# Altium PCB MAX98357.PcbDoc
Units mm, origin at the board's own origin, x right, y up, seen from the top; angles counter-clockwise.
Board outline 24.23 x 22.75 mm, 2 copper layers (Top Layer, Bottom Layer); 11 components, 13 nets, 57 pads, 48 vias.
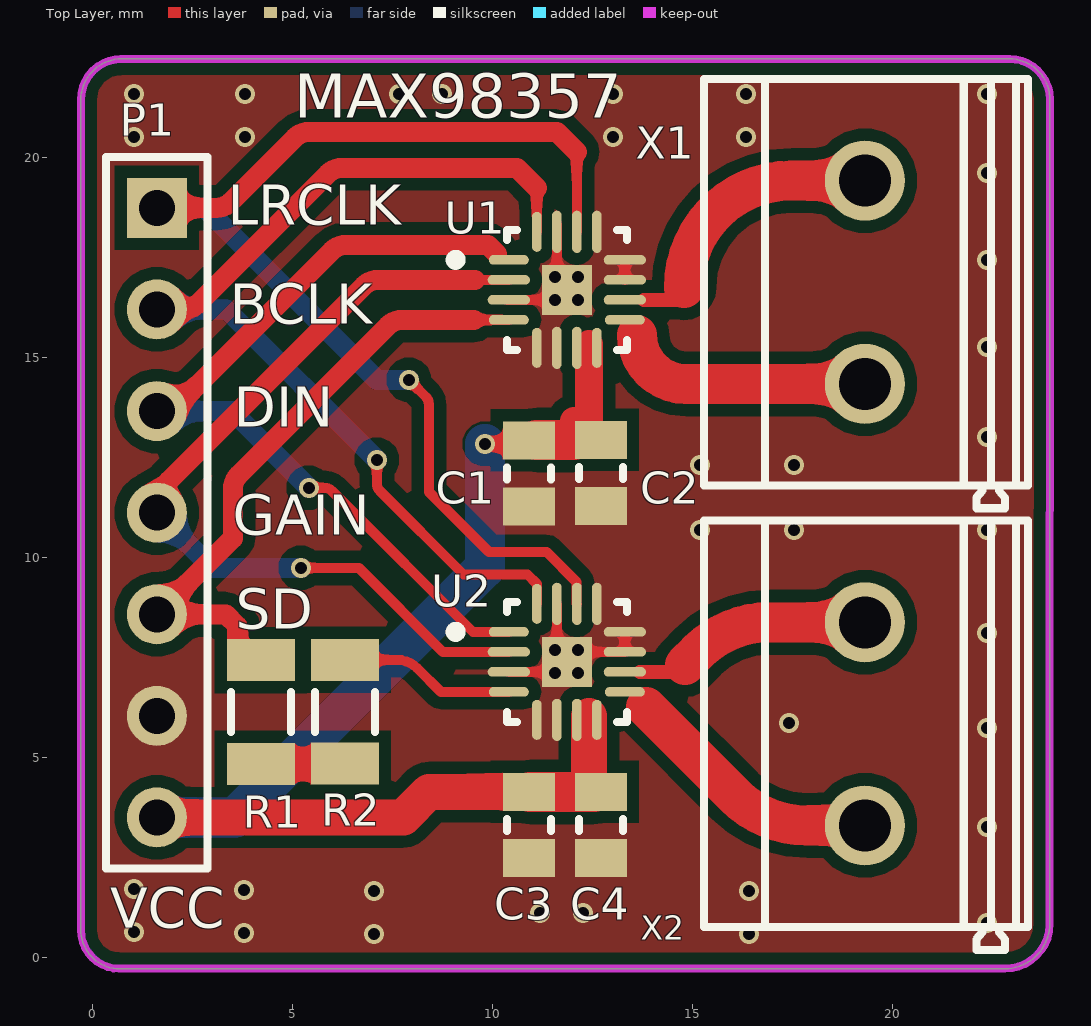
[diagram p0: Top Layer view]
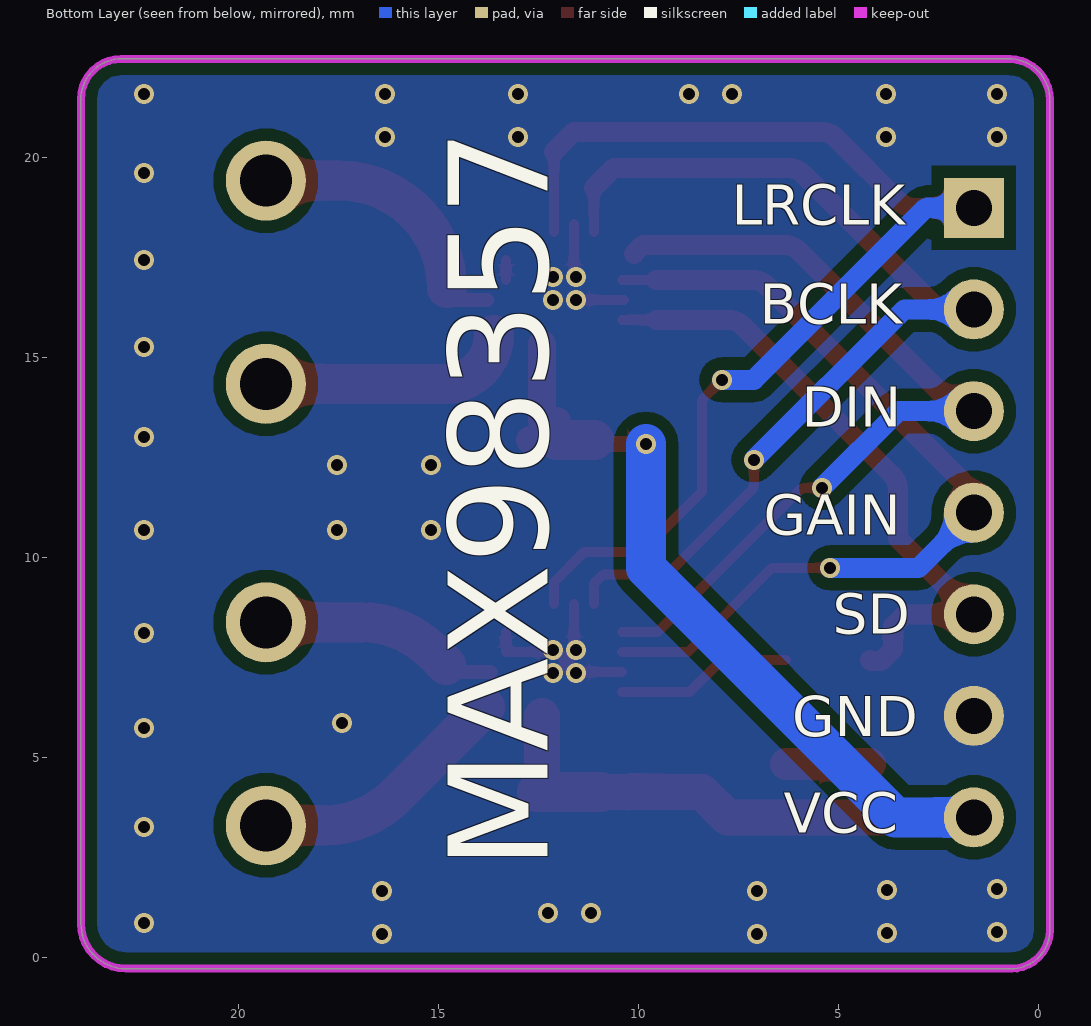
[diagram p1: Bottom Layer view, seen from below]
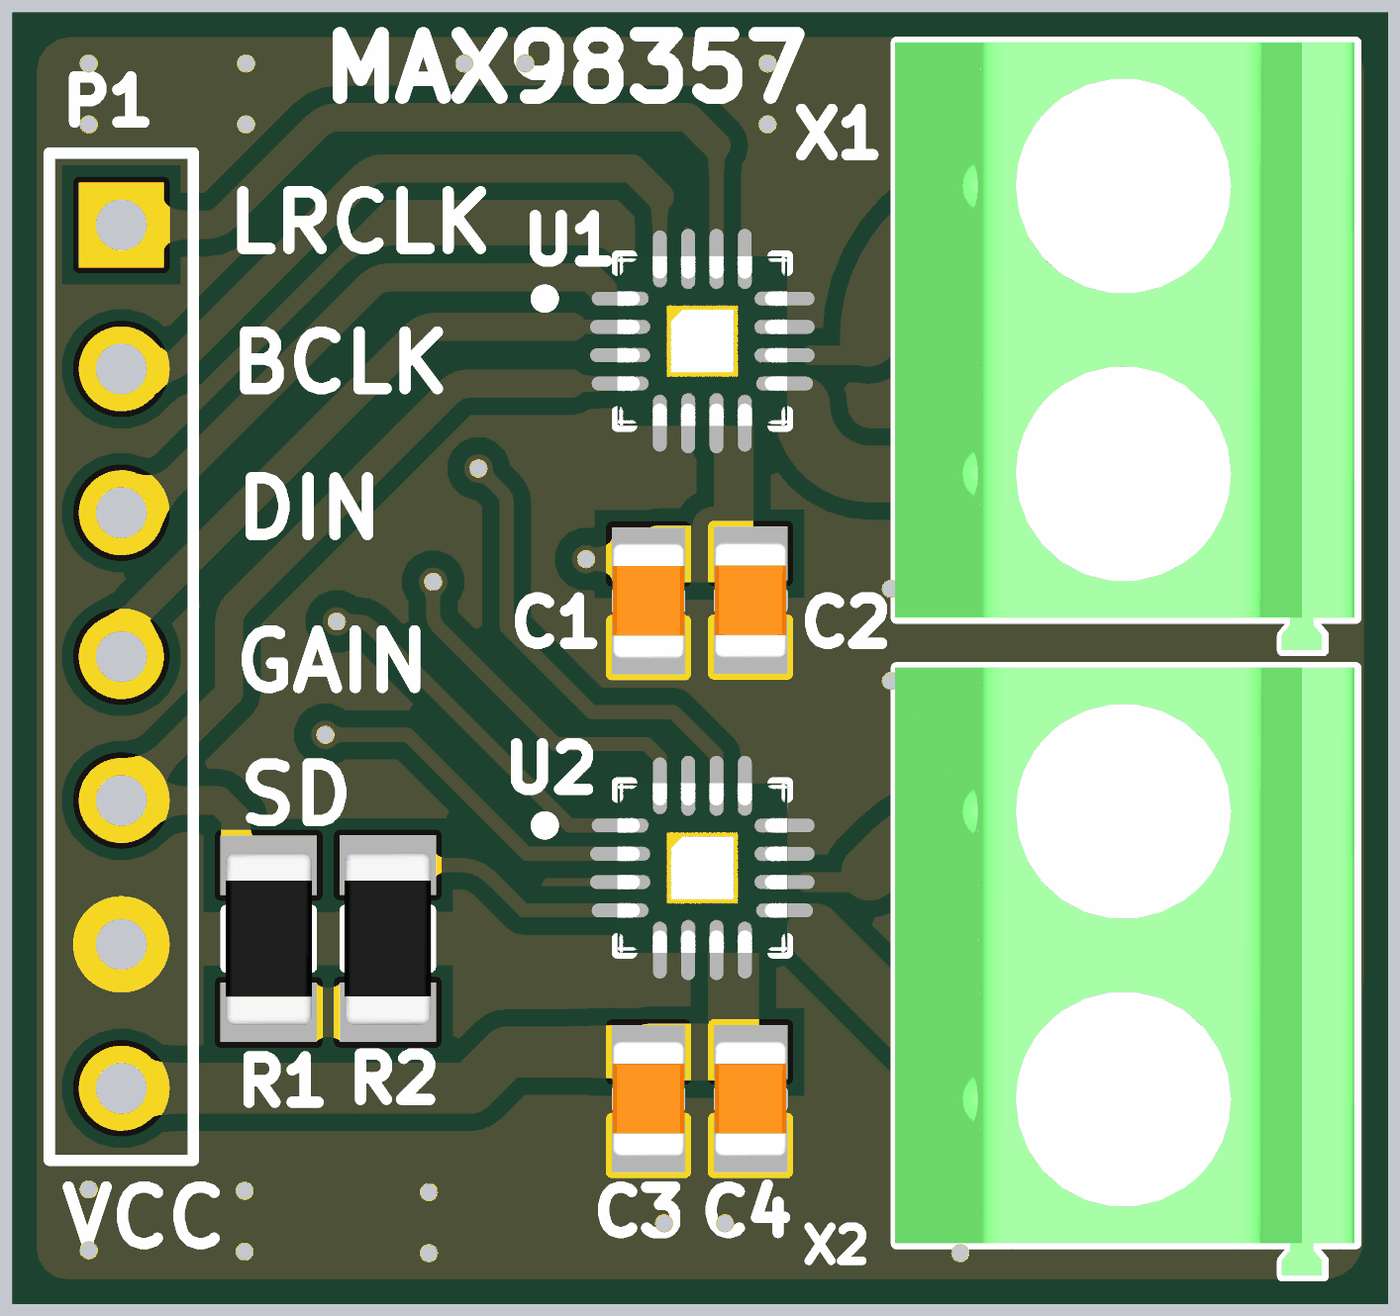
[diagram p2: 3D render of the assembled board from above, using the file's embedded part models]

## Layer stack, top to bottom
Top Solder: solder mask 0.0102, Solder Resist, Dk 3.5
Top Layer: signal copper 0.0356
Dielectric 1: dielectric 0.32, FR-4, Dk 4.8
Bottom Layer: signal copper 0.0356
Bottom Solder: solder mask 0.0102, Solder Resist, Dk 3.5

## Board outline
0.685,-0.283 cw(c0.685,0.687) -0.285,0.687 -0.285,21.442 cw(c0.736,21.442) 0.736,22.464 0.715,22.464 22.929,22.464 cw(c22.929,21.453) 23.94,21.453 23.937,0.843 cw(c22.811,0.843) 22.811,-0.283

## Design rules (kind name [scope] priority, off if disabled: settings)
Clearance plane_GND [InNet('GND')] p1: gap=0.3 ignorepadtopadclearanceinfootprint=FALSE
Clearance [All] p2: gap=0.3 ignorepadtopadclearanceinfootprint=FALSE
PolygonConnect PolygonConnect_1 [All vs IsNamedPolygon('GND TOP')] p1: connectstyle=Direct reliefconductorwidth=0.254 reliefentries=4 polygonreliefangle="90 Angle" airgapwidth=0.254
PolygonConnect [All] p2: connectstyle=Direct reliefconductorwidth=0.254 reliefentries=4 polygonreliefangle="90 Angle" airgapwidth=0.254
RoutingVias [All] p1: holewidth=0.711 width=1.27 viastyle="Through Hole" minholewidth=0.3 minwidth=1 maxholewidth=0.711 maxwidth=1.27
SolderMaskExpansion [All] p1: expansion=0.102 istentingtop=FALSE
Width [All] p1: maxlimit=1 minlimit=0.2 preferedwidth=0.25 minimp=50.000000 maximp=50.000000 favimp=50.000000
30 further rules are at their usual default settings.

## Components (designator, comment, footprint, x,y, rotation, side; value= is the part's Value field where it differs from the comment)
C1 "10u" "CAP 0805" 10.915,12.039 r270 top
C2 "100nf" "CAP 0805" 12.715,12.05 r270 top
C3 "10u" "CAP 0805" 10.915,3.25 r270 top
C4 "100nf" "CAP 0805" 12.715,3.25 r270 top
P1 "Header 7" HDR1X7 1.615,18.739 r270 top
R1 "100K" "RES 1206 (3216X08L)" 4.215,6.139 r270 top
R2 "100K" "RES 1206 (3216X08L)" 6.315,6.139 r90 top
U1 "" FP-T1633-4-IPC_A 11.864,16.689 r0 top
U2 "" FP-T1633-4-IPC_A 11.865,7.389 r0 top
X1 "CON_Phoenix_MKDSN_02" CON_MKDSN1,5/2-5,08 19.315,16.879 r90 top
X2 "CON_Phoenix_MKDSN_02" CON_MKDSN1,5/2-5,08 19.315,5.839 r90 top

## Footprints (in the part's own frame and the unit in brackets; to place one, negate y for a bottom-side part, rotate by r counter-clockwise, add the part's x,y. Pads: shape width x height; smd on the part's side, far side on the other; paste and mask are expansions set on the pad)
"CAP 0805" [mm]
  rect 0.95x1.3 smd: 1(-0.889,0) 2(0.761,0)
  silkscreen extent -0.21,-0.55 0.09,0.55, body extent -1.08,-0.63 0.95,0.63, height 0.65
CON_MKDSN1,5/2-5,08 [mm]
  round 2 hole 1.3: 1(-2.54,0) 2(2.54,0)
  silkscreen extent -5.65,-4.07 5.08,4.03, body extent -5.64,-4.05 5.09,4.05, height 10.03
FP-T1633-4-IPC_A [mm]
  oval 1x0.242 smd paste+0 mask+0: 1(-1.451,0.75)
  rrect100% 1.057x0.242 smd paste+0 mask+0: 2(-1.451,0.25) 3(-1.451,-0.25) 10(1.451,-0.25) 11(1.451,0.25) 12(1.451,0.75)
  rrect100% 1x0.242 smd paste+0 mask+0: 4(-1.451,-0.75) 9(1.451,-0.75)
  rrect100% 0.242x1 smd paste+0 mask+0: 5(-0.75,-1.451) 8(0.75,-1.451) 16(-0.75,1.451)
  rrect100% 0.242x1.057 smd paste+0 mask+0: 6(-0.25,-1.451) 7(0.25,-1.451) 13(0.75,1.451) 14(0.25,1.451) 15(-0.25,1.451)
  rect 1.25x1.25 smd paste-1000 mask+0: 17(0,0)
  silkscreen extent -2.9,-1.5 1.5,1.5, body extent -2.48,-2.48 2.48,2.48, height 0.25
HDR1X7 [mm] "Connector; Header; 7 Position"
  rect 1.5x1.5 hole 0.9: 1(0,0)
  round 1.5 hole 0.9: 2(2.54,0) 3(5.08,0) 4(7.62,0) 5(10.16,0) 6(12.7,0) 7(15.24,0)
  silkscreen extent -1.27,-1.27 16.51,1.27
"RES 1206 (3216X08L)" [mm] "Chip Resistor, 2-Leads, Body 3.2x1.6mm, IPC High Density _ (0.125 W)"
  rect 1.05x1.7 smd: 1(-1.295,0) 2(1.301,0)
  silkscreen extent -0.5,-0.75 0.5,0.75, body extent -1.52,-0.76 1.53,0.76, height 0.6

## Part data
C1 C2 C3 C4: library part Capacitor, "Capacitor"
P1: "Header, 7-Pin", LatestRevisionDate=17-Jul-2002, LatestRevisionNote="Re-released for DXP Platform.", Publisher="Altium Limited"
R1 R2: library part Resistor, "Resistor", Power="1/4 W", Tolerance=5%
U1 U2: library part CMP-05698-000018-1, "IC AMP CLASS D MONO 3.2W 16TQFN", Max Operating Temperature=85°C, Max Output Current=1.6A, Max Output Power=3.2W, Max Power Dissipation=1.666W, Max Supply Voltage=5.5V, Min Operating Temperature=-40°C, Min Supply Voltage=2.5V, Power Supply Rejection Ratio (PSRR)=77dB, Voltage Gain=15dB, Contact Plating=Tin, Mount="Surface Mount", Number of Pins=16, Packaging="Tape and Reel", Radiation Hardening=No, RoHS Compliant=Yes, Series=-
X1 X2: Manufacturer="PHOENIX CONTACT", Max Current="13.5 A", Voltage="400 V", Category=Connector, Company="SJ Libraries", ComponentLink1Description=Datasheet, ComponentLink2Description=Reference, Connector type="PCB Terminal Block", Designer="Eng. Saeid Jorablo", HelpURL=http://s3.picofile.com/file/7443264187/Coming_Soon_logo.gif, Mounting Technology=Through-Hole, Pin Count=2, Positions=2, Publisher="SJ UnLimited", Revision 1="2012/10/1 : Adding Model", Status=Unreleased, Update=2012/10/1

## Via types
v1: diameter 0.5, hole 0.3, Top Layer to Bottom Layer, tented both sides, 48 vias

## Nets (pads, with @x,y where several pads share a name; then routed paths per layer and width w, separated by ;. In a path a pad name is that pad's centre, name@x,y a point inside that pad or via, vN(x,y) a via of type N, cw(c..) or ccw(c..) an arc to the next point about the centre after c; other vN are vias at no path point)
BCLK: P1.2 U1.16 U2.16 | length 25.5
  Top Layer w0.25: v1(7.115,12.439) 7.115,11.843 ccw(c7.365,11.843) 7.188,11.666 9.279,9.575 10.879,9.575 11.115,9.339 U2.16 ; U1.16@11.115,18.14 11.115,19.239
  Top Layer w0.5: P1.2 2.293,16.199 ccw(c2.293,16.699) 2.645,16.345 5.894,19.594 cw(c6.247,19.239) 6.247,19.739 10.615,19.739 11.115,19.239
  Bottom Layer w0.5: P1.2 3.355,16.199 v1(7.115,12.439)
DIN: P1.3 U1.1 U2.1 | length 21.3
  Top Layer w0.25: v1(5.415,11.739) 5.811,11.739 cw(c5.811,11.489) 5.987,11.667 6.149,11.505 9.515,8.139 U2.1
  Top Layer w0.5: P1.3 1.778,13.659 ccw(c1.778,14.159) 2.13,13.805 5.994,17.669 cw(c6.347,17.314) 6.347,17.814 9.89,17.814 10.115,17.589
  Bottom Layer w0.5: P1.3 3.495,13.659 v1(5.415,11.739)
GAIN: P1.4 U1.2 U2.2 | length 21.5
  Top Layer w0.25: v1(5.215,9.739) 6.664,9.739 8.764,7.639 U2.2 ; 9.765,16.939 U1.2
  Top Layer w0.5: P1.4 1.614,11.138 cw(c2.739,11.148) 1.942,11.941 6.793,16.793 cw(c7.147,16.439) 7.147,16.939 9.565,16.939
  Bottom Layer w0.5: P1.4 2.995,9.739 v1(5.215,9.739)
GND: C1.2 C2.2 C3.2 C4.2 P1.6 U1.3 U1.5 U1.6 U1.11 U1.12 U1.13 U1.15 U1.17 U2.3 U2.5 U2.6 U2.11 U2.12 U2.13 U2.15 U2.17 | length 8.2
  Top Layer w0.25: U1.3@10.364,16.439 v1(11.565,16.439) ; U2.3 11.615,7.139 ccw(c11.615,7.389) U2.17 ; U2.15 11.615,7.639 ccw(c11.865,7.639) U2.17 ; U1.17@11.615,17.139 U1.15@11.615,18.339 ; U2.12 U2.11 12.115,7.639 ccw(c12.115,7.389) U2.17 ; U1.11 U1.12
  other v1: 7.04,0.589 16.415,0.589 3.79,0.614 1.04,0.639 22.365,0.864 11.19,1.114 12.265,1.114 7.04,1.664 16.415,1.664 3.79,1.689 1.04,1.714 22.365,3.264 22.365,5.739 17.415,5.864 11.565,7.114 12.14,7.114 11.565,7.689 12.14,7.689 22.365,8.114 15.19,10.689 17.54,10.689 22.365,10.689 15.19,12.314 17.54,12.314 22.365,13.014 22.365,15.264 12.14,16.439 11.565,17.014 12.14,17.014 22.365,17.439 22.365,19.614 1.04,20.514 3.815,20.514 13.015,20.514 16.34,20.514 1.04,21.589 3.815,21.589 7.665,21.589 8.74,21.589 13.015,21.589 16.34,21.589 22.365,21.589
LEFTN: U1.10 X1.2 | length 7.1
  Top Layer w0.35: U1.10@13.79,16.439 14.79,16.439
  Top Layer w1: 14.79,16.739 cw(c17.47,16.739) 17.47,19.419 X1.2
LEFTP: U1.9 X1.1 | length 6.4
  Top Layer w1: 13.615,15.564 ccw(c14.84,15.564) 14.84,14.339 X1.1
LRCLK: P1.1 U1.14 U2.14 | length 29.7
  Top Layer w0.25: v1(7.915,14.439) 8.342,14.012 cw(c8.165,13.836) 8.415,13.836 8.415,11.639 9.915,10.139 11.353,10.139 12.111,9.381 12.111,8.843 U2.14 ; U1.14@12.115,18.14 12.115,20.139
  Top Layer w0.5: P1.1 3.108,18.739 ccw(c3.108,19.239) 3.46,18.885 5.069,20.493 cw(c5.422,20.139) 5.422,20.639 11.615,20.639 12.115,20.139
  Bottom Layer w0.5: P1.1 2.815,18.739 7.115,14.439 v1(7.915,14.439)
NetR1_2: R1.2 R2.1 | length 2.1
  Top Layer w0.254: R2.1 R2.1@6.319,4.84
  Top Layer w0.5: R1.2 R1.2@4.217,4.837 ; R2.1@6.313,4.837 R2.1@6.315,4.835
  Top Layer w0.8: R1.2@4.217,4.837 R2.1@6.313,4.837
NetR2_2: R2.2 U2.4 | length 4.4
  Top Layer w0.25: R2.2 7.612,7.44 7.614,7.44 cw(c7.613,6.713) 8.126,7.227 8.128,7.226 8.715,6.639 U2.4@10.414,6.639
RIGHTN: U2.10 X2.2 | length 5.6
  Top Layer w0.35: U2.10@13.694,7.139 14.434,7.139
  Top Layer w1: 14.815,7.314 15.136,7.635 cw(c16.932,5.839) 16.932,8.379 X2.2
RIGHTP: U2.9 X2.1 | length 6.6
  Top Layer w1: 13.84,6.264 16.061,4.043 ccw(c17.857,5.839) 17.857,3.299 X2.1
SD: P1.5 R1.1 U1.4 | length 16.1
  Top Layer w0.25: 9.549,15.939 U1.4
  Top Layer w0.5: R1.1 4.187,7.407 3.933,7.407 3.631,7.71 3.631,8.286 3.338,8.579 P1.5 3.515,10.479 3.515,11.707 cw(c4.015,11.707) 3.66,12.06 7.394,15.794 cw(c7.747,15.439) 7.747,15.939 9.549,15.939
VCC: C1.1 C2.1 C3.1 C4.1 P1.7 U1.7 U1.8 U2.7 U2.8 | length 31.3
  Top Layer w0.25: C1.1@10.826,12.839 ccw(c10.826,12.928) C1.1
  Top Layer w0.4: v1(9.815,12.839) C1.1@10.826,12.839
  Top Layer w0.7: 12.04,13.414 12.373,13.081 ccw(c12.715,13.422) 12.477,13.002 ccw(c12.715,13.422) C2.1 ; C2.1@12.415,13.414 12.415,15.339
  Top Layer w0.9: P1.7 7.775,3.499 8.415,4.139 C3.1 ; 12.415,4.674 12.415,6.039
  Top Layer w1: C3.1@10.94,4.139 C4.1@12.54,4.139 ; C1.1@11.109,12.934 12.04,12.934
  Bottom Layer w1: P1.7 3.575,3.499 9.815,9.739 v1(9.815,12.839)

## Polygon pours and split planes (outlines as drawn)
GND on Bottom Layer "GND_L02_P000" (solid, remove dead copper, pour order 0): -0.285,0.689 ccw(c0.69,0.689) 0.69,-0.286 22.815,-0.286 ccw(c22.815,0.839) 23.94,0.839 23.94,21.464 ccw(c22.94,21.464) 22.94,22.464 0.74,22.464 ccw(c0.74,21.439) -0.285,21.439
GND on Top Layer "GND_L01_P001" (solid, remove dead copper, pour order 1): -0.286,0.689 ccw(c0.689,0.689) 0.689,-0.286 22.814,-0.286 ccw(c22.814,0.839) 23.939,0.839 23.939,21.464 ccw(c22.939,21.464) 22.939,22.464 0.739,22.464 ccw(c0.739,21.439) -0.286,21.439

## Keep-outs
Keep-Out Layer:
  lines w0.2: 0.665,-0.283 22.811,-0.283 ccw(c22.811,0.843) 23.937,0.843 23.94,21.453 ccw(c22.929,21.453) 22.929,22.464 0.715,22.464 ; 0.685,-0.283 cw(c0.685,0.687) -0.285,0.687 -0.285,21.442 cw(c0.736,21.442) 0.736,22.464

## Silkscreen, mask and mechanical layers (free items; w line width, h text height)
Top Overlay:
  text "MAX98357" at 5.044,20.993 h1.1
  text "LRCLK" at 3.39,18.314 h1
  text "BCLK" at 3.44,15.839 h1
  text "DIN" at 3.54,13.264 h1
  text "GAIN" at 3.515,10.564 h1
  text "SD" at 3.59,8.214 h1
  text "VCC" at 0.453,0.748 h1
Bottom Overlay:
  text "LRCLK" at 7.665,18.314 h1
  text "BCLK" at 6.965,15.839 h1
  text "DIN" at 5.915,13.264 h1
  text "GAIN" at 6.865,10.564 h1
  text "SD" at 5.14,8.089 h1
  text "GND" at 6.157,5.531 h1
  text "VCC" at 6.365,3.114 h1
  text "MAX98357" at 12.269,2.193 h2.5 r270